# Altium PCB Logica.PcbDoc
Units mm, origin at the board's own origin, x right, y up, seen from the top; angles counter-clockwise.
Board outline 94.61 x 132.46 mm, 2 copper layers (Top Layer, Bottom Layer); 23 components, 55 nets, 143 pads, 4 vias.
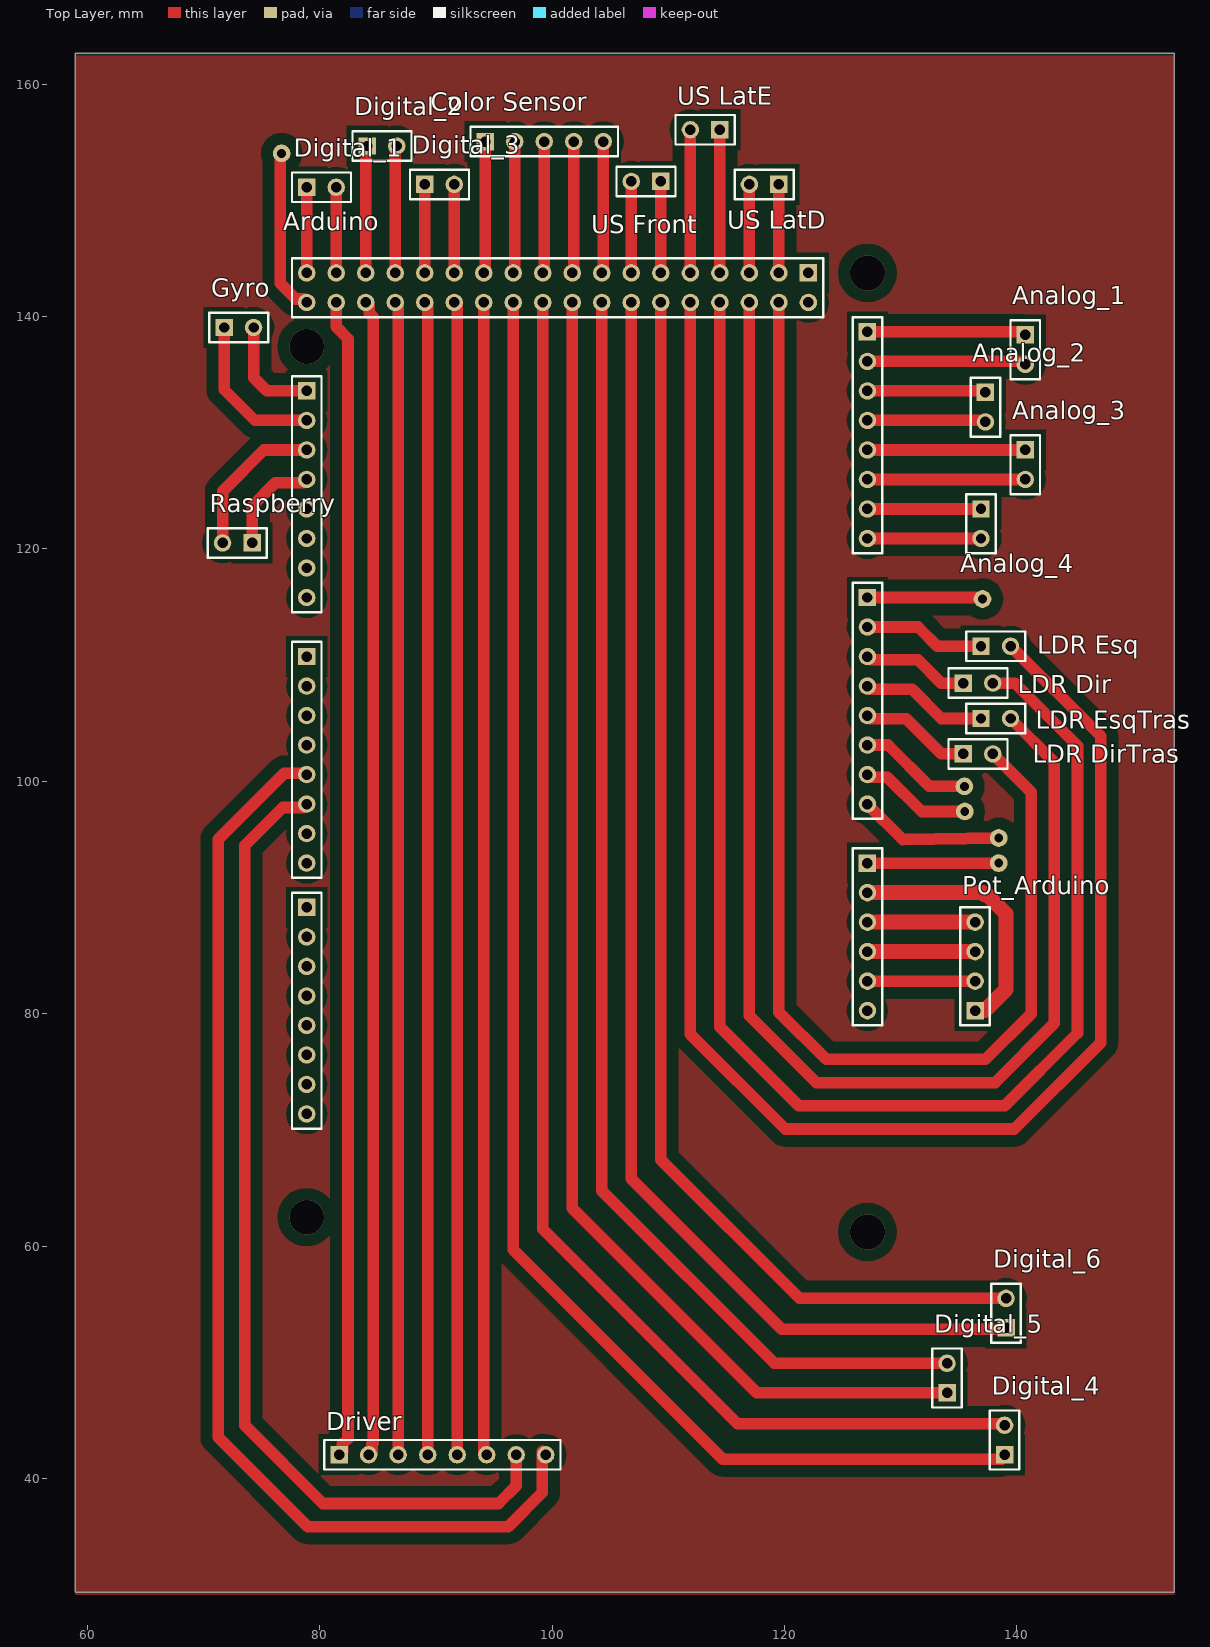
[diagram p0: Top Layer view]
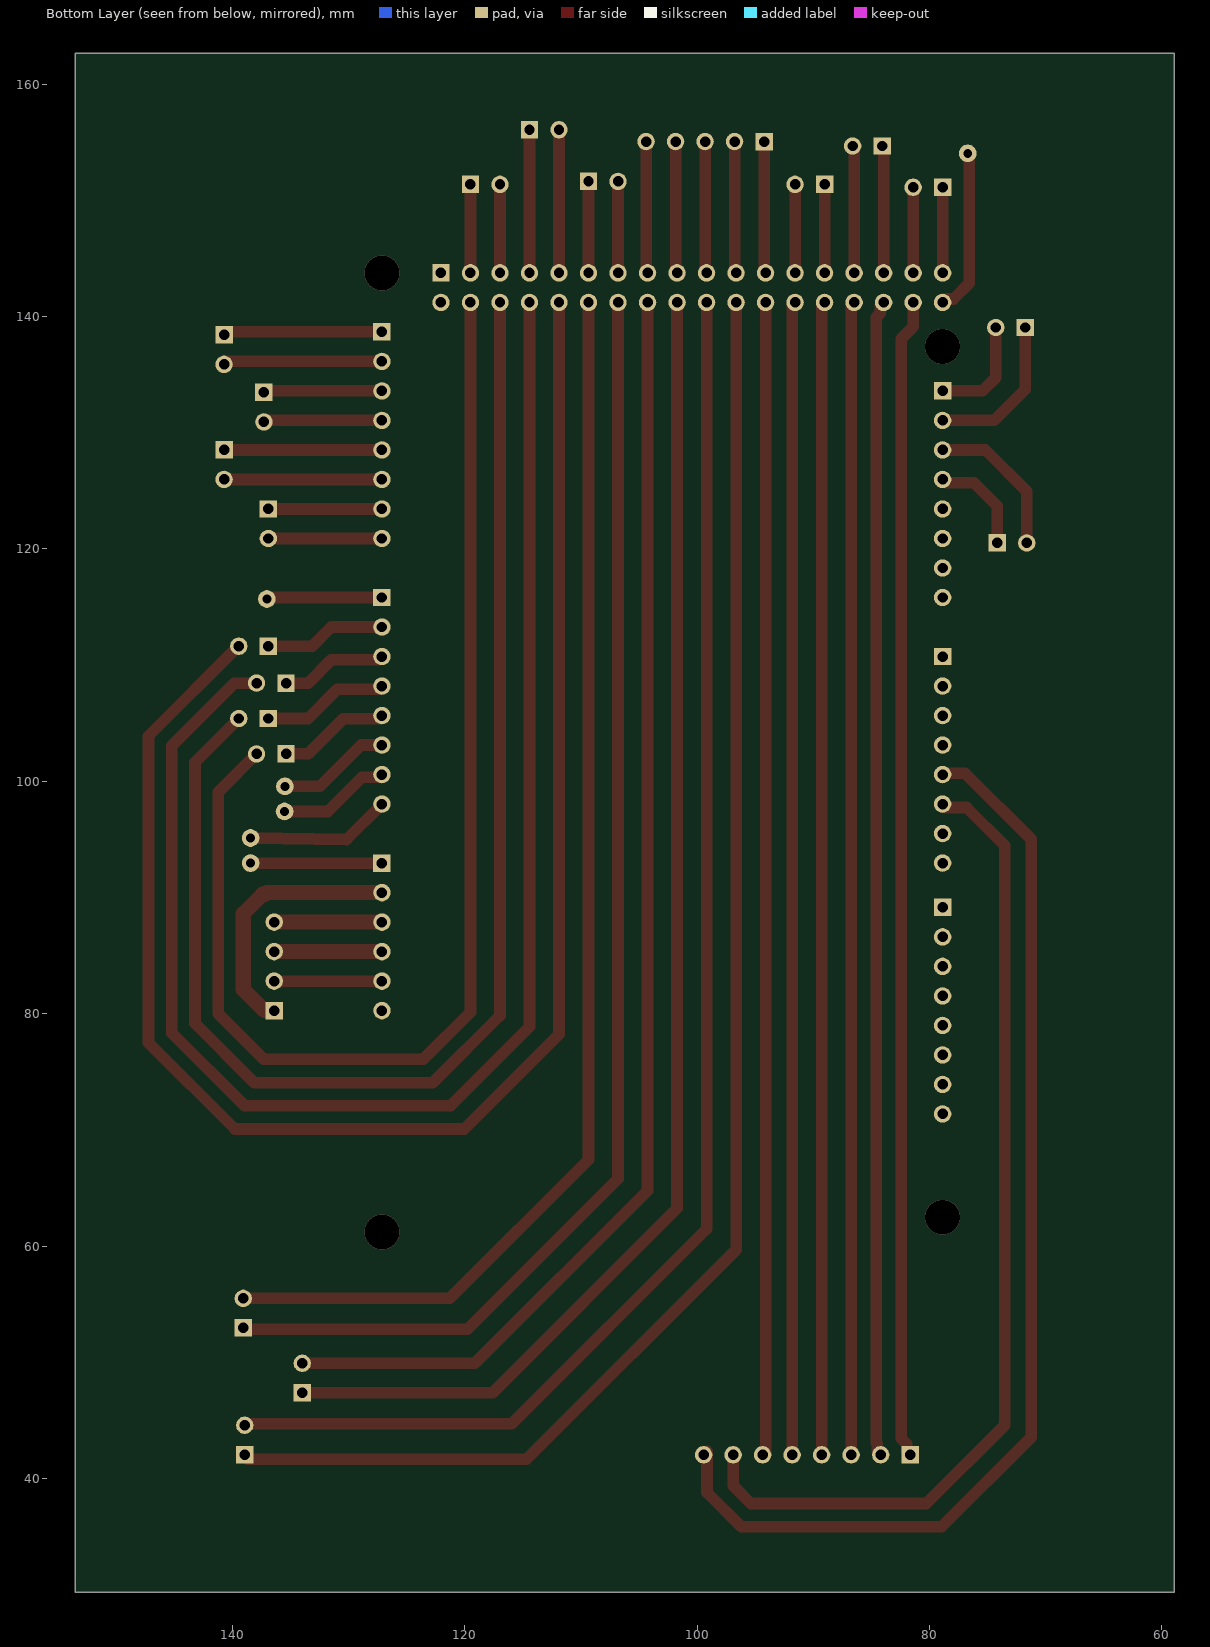
[diagram p1: Bottom Layer view, seen from below]

## Layer stack, top to bottom
Top Solder: solder mask 0.0102, Solder Resist, Dk 3.5
Top Layer: signal copper 0.0356
Dielectric 1: dielectric 0.32, FR-4, Dk 4.8
Bottom Layer: signal copper 0.0356
Bottom Solder: solder mask 0.0102, Solder Resist, Dk 3.5

## Board outline
58.928,30.226 153.543,30.226 153.543,162.687 58.928,162.687

## Design rules (kind name [scope] priority, off if disabled: settings)
Clearance [All] p1: gap=1
PolygonConnect [All] p1: connectstyle=Relief reliefconductorwidth=0.254 reliefentries=4 polygonreliefangle="90 Angle" airgapwidth=0.254
RoutingVias [All] p1: holewidth=0.711 width=1.27 viastyle="Through Hole" minholewidth=0.711 minwidth=1.27 maxholewidth=0.711 maxwidth=1.27
SolderMaskExpansion [All] p1: expansion=0.102
UnpouredPolygon [All] p1: allowunpoured=FALSE
Width [All] p1: maxlimit=1.3 minlimit=1 preferedwidth=1
29 further rules are at their usual default settings.

## Components (designator, comment, footprint, x,y, rotation, side; value= is the part's Value field where it differs from the comment)
Analog_1 "Header 2" HDR1X2 140.716,138.43 r270 top
Analog_2 "Header 2" HDR1X2 137.287,133.477 r270 top
Analog_3 "Header 2" HDR1X2 140.716,128.524 r270 top
Analog_4 "Header 2" HDR1X2 136.906,123.444 r270 top
Arduino "Arduino" Arduino 101.727,100.584 r90 top
"Color Sensor" "Header 5" HDR1X5 94.234,155.067 r0 top
Digital_1 "Header 2" HDR1X2 78.867,151.13 r0 top
Digital_2 "Header 2" HDR1X2 84.074,154.686 r0 top
Digital_3 "Header 2" HDR1X2 89.027,151.384 r0 top
Digital_4 "Header 2" HDR1X2 138.938,42.037 r90 top
Digital_5 "Header 2" HDR1X2 133.985,47.371 r90 top
Digital_6 "Header 2" HDR1X2 139.065,52.959 r90 top
Driver "Header 8" HDR1X8 81.661,42.037 r0 top
Gyro "Header 2" HDR1X2 71.755,139.065 r0 top
"LDR Dir" "Header 2" HDR1X2 135.382,108.458 r0 top
"LDR DirTras" "Header 2" HDR1X2 135.382,102.362 r0 top
"LDR Esq" "Header 2" HDR1X2 136.906,111.633 r0 top
"LDR EsqTras" "Header 2" HDR1X2 136.906,105.41 r0 top
Pot_Arduino "Header 4" HDR1X4 136.398,80.264 r90 top
Raspberry "Header 2" HDR1X2 74.168,120.523 r180 top
"US Front" "Header 2" HDR1X2 109.347,151.638 r180 top
"US LatD" "Header 2" HDR1X2 119.507,151.384 r180 top
"US LatE" "Header 2" HDR1X2 114.427,156.083 r180 top

## Footprints (in the part's own frame and the unit in brackets; to place one, negate y for a bottom-side part, rotate by r counter-clockwise, add the part's x,y. Pads: shape width x height; smd on the part's side, far side on the other; paste and mask are expansions set on the pad)
Arduino [mm] "Arduino Mega 2560"
  rect 1.5x1.5 hole 0.9: 0(10.16,22.86) 8(-11.43,22.86) 21(33.02,22.86) 59(-7.62,-25.4) 67(15.24,-25.4) 75(38.1,-25.4) 79(43.18,-20.32)
  round 1.5 hole 0.9: 1(7.62,22.86) 2(5.08,22.86) 3(2.54,22.86) 4(0,22.86) 5(-2.54,22.86) 6(-5.08,22.86) 7(-7.62,22.86) 9(-13.97,22.86) 10(-16.51,22.86) 11(-19.05,22.86) 12(-21.59,22.86) 13(-24.13,22.86) 14(15.24,22.86) 15(17.78,22.86) 16(20.32,22.86) 17(22.86,22.86) 18(25.4,22.86) 19(27.94,22.86) 20(30.48,22.86) 22(40.64,20.32) 23(43.18,20.32) 24(40.64,17.78) 25(43.18,17.78) 26(40.64,15.24) 27(43.18,15.24) 28(40.64,12.7) 29(43.18,12.7) 30(40.64,10.16) 31(43.18,10.16) 32(40.64,7.62) 33(43.18,7.62) 34(40.64,5.08) 35(43.18,5.08) 36(40.64,2.54) 37(43.18,2.54) 38(40.64,0) 39(43.18,0) 40(40.64,-2.54) 41(43.18,-2.54) 42(40.64,-5.08) 43(43.18,-5.08) 44(40.64,-7.62) 45(43.18,-7.62) 46(40.64,-10.16) 47(43.18,-10.16) 48(40.64,-12.7) 49(43.18,-12.7) 50(40.64,-15.24) 51(43.18,-15.24) 52(40.64,-17.78) 53(43.18,-17.78) 54(-20.32,-25.4) 55(-17.78,-25.4) 56(-15.24,-25.4) 57(-12.7,-25.4) 58(-10.16,-25.4) 60(-2.54,-25.4) 61(0,-25.4) 62(2.54,-25.4) 63(5.08,-25.4) 64(7.62,-25.4) 65(10.16,-25.4) 66(12.7,-25.4) 68(20.32,-25.4) 69(22.86,-25.4) 70(25.4,-25.4) 71(27.94,-25.4) 72(30.48,-25.4) 73(33.02,-25.4) 74(35.56,-25.4) 76(-26.67,22.86) 77(-29.21,22.86) 78(40.64,-20.32) 80(43.18,22.86) 81(40.64,22.86)
  silkscreen extent -30.48,-26.67 44.45,24.13
HDR1X2 [mm] "Connector; Header; 2 Position"
  rect 1.5x1.5 hole 0.9: 1(0,0)
  round 1.5 hole 0.9: 2(2.54,0)
  silkscreen extent -1.27,-1.27 3.81,1.27
HDR1X4 [mm] "Connector; Header; 4 Position"
  rect 1.5x1.5 hole 0.9: 1(0,0)
  round 1.5 hole 0.9: 2(2.54,0) 3(5.08,0) 4(7.62,0)
  silkscreen extent -1.27,-1.27 8.89,1.27
HDR1X5 [mm] "Connector; Header; 5 Position"
  rect 1.5x1.5 hole 0.9: 1(0,0)
  round 1.5 hole 0.9: 2(2.54,0) 3(5.08,0) 4(7.62,0) 5(10.16,0)
  silkscreen extent -1.27,-1.27 11.43,1.27
HDR1X8 [mm] "Connector; Header; 8 Position"
  rect 1.5x1.5 hole 0.9: 1(0,0)
  round 1.5 hole 0.9: 2(2.54,0) 3(5.08,0) 4(7.62,0) 5(10.16,0) 6(12.7,0) 7(15.24,0) 8(17.78,0)
  silkscreen extent -1.27,-1.27 19.05,1.27

## Part data
Analog_1 Analog_2 Analog_3 Analog_4 Digital_1 Digital_2 Digital_3 Digital_4 Digital_5 Digital_6 Gyro "LDR Dir" "LDR DirTras" "LDR Esq" "LDR EsqTras" Raspberry "US Front" "US LatD" "US LatE": "Header, 2-Pin"
"Color Sensor": "Header, 5-Pin"
Driver: "Header, 8-Pin"
Pot_Arduino: "Header, 4-Pin"

## Free pads (board coordinates)
  round 1.524 hole 0.762: 0(76.708,154.051) 1(137.033,115.697) 2(138.43,95.123) 3(138.43,92.964) 4(135.477,99.568) 5(135.509,97.409)

## Via types
v1: diameter 3, hole 3, Top Layer to Bottom Layer, 4 vias

## Nets (pads, with @x,y where several pads share a name; then routed paths per layer and width w, separated by ;. In a path a pad name is that pad's centre, name@x,y a point inside that pad or via, vN(x,y) a via of type N, cw(c..) or ccw(c..) an arc to the next point about the centre after c; other vN are vias at no path point)
3.3V: Arduino.55 Pot_Arduino.2 | length 9.3
  Top Layer w1: Arduino.55 Pot_Arduino.2
ALIMENTACAO: Arduino.56 Pot_Arduino.3 | length 9.3
  Top Layer w1.3: Arduino.56 Pot_Arduino.3
ANALOG_1A: Analog_1.1 Arduino.75 | length 13.6
  Top Layer w1: Arduino.75 Analog_1.1@140.716,138.684
ANALOG_1B: Analog_1.2 Arduino.74 | length 13.5
  Top Layer w1: Arduino.74@127.254,136.144 Analog_1.2@140.716,136.144
ANALOG_2A: Analog_2.1 Arduino.73 | length 9.9
  Top Layer w1: Arduino.73 Analog_2.1@137.033,133.604
ANALOG_2B: Analog_2.2 Arduino.72 | length 9.7
  Top Layer w1: Arduino.72@127.254,131.064 Analog_2.2@136.906,131.064
ANALOG_3A: Analog_3.1 Arduino.71 | length 13.6
  Top Layer w1: Arduino.71 Analog_3.1
ANALOG_3B: Analog_3.2 Arduino.70 | length 13.6
  Top Layer w1: Arduino.70 Analog_3.2
ANALOG_4A: Analog_4.1 Arduino.69 | length 9.8
  Top Layer w1: Arduino.69 Analog_4.1
ANALOG_4B: Analog_4.2 Arduino.68 | length 9.7
  Top Layer w1: Arduino.68 Analog_4.2@136.779,120.904
ANALOGD: "LDR Dir.1" Arduino.65 | length 9.2
  Top Layer w1: Arduino.65 127.417,110.454 131.481,110.454 133.477,108.458 135.382,108.458
ANALOGDT: "LDR DirTras.1" Arduino.63 | length 9.6
  Top Layer w1: Arduino.63 127.417,105.374 130.465,105.374 133.477,102.362 135.382,102.362
ANALOGE: "LDR Esq.1" Arduino.66 | length 10.5
  Top Layer w1: Arduino.66 131.479,113.284 133.13,111.633 136.906,111.633
ANALOGET: "LDR EsqTras.1" Arduino.64 | length 10.9
  Top Layer w1: Arduino.64 127.417,107.914 130.973,107.914 133.477,105.41 136.906,105.41
D_1A: Arduino.80 Digital_1.1 | length 7.4
  Top Layer w1: Arduino.80 Digital_1.1
D_1B: Arduino.23 Digital_1.2 | length 7.2
  Top Layer w1: Arduino.23 Digital_1.2@81.407,151.003
D_2A: Arduino.25 Digital_2.1 | length 10.2
  Top Layer w1: Arduino.25 83.947,153.924
D_2B: Arduino.27 Digital_2.2 | length 10.2
  Top Layer w1: Arduino.27 86.487,153.924
D_3A: Arduino.29 Digital_3.1 | length 7.6
  Top Layer w1: Arduino.29 Digital_3.1
D_3B: Arduino.31 Digital_3.2 | length 7.5
  Top Layer w1: Arduino.31 Digital_3.2@91.567,151.257
D_4A: Arduino.34 Digital_4.1 | length 131
  Top Layer w1: Arduino.34 96.647,59.69 114.681,41.656 Digital_4.1@138.684,41.656
D_4B: Arduino.36 Digital_4.2 | length 126.2
  Top Layer w1: Arduino.36 99.187,61.468 115.951,44.704 Digital_4.2@138.684,44.704
D_5A: Arduino.38 Digital_5.1 | length 116.8
  Top Layer w1: Arduino.38 101.727,63.246 117.602,47.371 Digital_5.1
D_5B: Arduino.40 Digital_5.2 | length 112.3
  Top Layer w1: Arduino.40 104.267,64.77 119.126,49.911 Digital_5.2
D_6A: Arduino.42 Digital_6.1 | length 112.7
  Top Layer w1: Arduino.42 106.807,65.786 119.761,52.832 Digital_6.1@138.684,52.832
D_6B: Arduino.44 Digital_6.2 | length 108.2
  Top Layer w1: Arduino.44 109.347,67.437 121.285,55.499 Digital_6.2@138.811,55.499
ECHODIR: "US LatD.2" Arduino.51 | length 7.6
  Top Layer w1: Arduino.51 116.967,151.384
ECHOESQ: "US LatE.2" Arduino.47 | length 12.3
  Top Layer w1: Arduino.47 111.887,156.083
ECHOF: "US Front.2" Arduino.43 | length 7.9
  Top Layer w1: Arduino.43 106.807,151.638
GND: Arduino.57 Pot_Arduino.4 | length 9
  Top Layer w1.3: Arduino.57@127.417,87.884 Pot_Arduino.4
GNDLOGIC: Arduino.58 Pot_Arduino.1 | length 22.6
  Top Layer w1.3: Arduino.58 137.04,90.424 137.18,90.284 137.392,90.284 139.065,88.611 139.065,82.077 137.252,80.264 Pot_Arduino.1
LEDD: "LDR Dir.2" Arduino.48 | length 132.8
  Top Layer w1: Arduino.48 114.427,78.867 121.221,72.073 121.914,72.073 135.63,72.073 138.944,72.073 145.215,78.344 145.215,103.07 139.827,108.458 137.922,108.458
LEDDT: "LDR DirTras.2" Arduino.52 | length 109.8
  Top Layer w1: Arduino.52 119.507,80.137 123.571,76.073 137.287,76.073 141.215,80.001 141.215,99.069 137.922,102.362
LEDE: "LDR Esq.2" Arduino.46 | length 142.1
  Top Layer w1: Arduino.46 111.887,78.232 120.046,70.073 121.086,70.073 134.802,70.073 139.772,70.073 147.215,77.516 147.215,103.898 139.48,111.633 139.446,111.633
LEDET: "LDR EsqTras.2" Arduino.50 | length 119.9
  Top Layer w1: Arduino.50 116.967,79.849 122.743,74.073 136.459,74.073 138.115,74.073 143.215,79.173 143.215,101.641 139.446,105.41
M1EN: Arduino.22 Driver.1 | length 99.9
  Top Layer w1: Arduino.22 81.407,139.117 82.423,138.101 82.423,43.441 81.951,42.969 81.951,42.327 Driver.1
M1INA: Arduino.26 Driver.3 | length 99.3
  Top Layer w1: Arduino.26 86.741,140.97 Driver.3
M1INB: Arduino.28 Driver.4 | length 99.3
  Top Layer w1: Arduino.28 89.281,140.97 Driver.4
M1PWM: Arduino.5 Driver.7 | length 86.2
  Top Layer w1: Arduino.5 78.577,97.754 76.809,97.754 73.533,94.478 73.533,44.577 80.264,37.846 95.377,37.846 96.901,39.37 Driver.7
M2EN: Arduino.24 Driver.2 | length 99.6
  Top Layer w1: Arduino.24 84.237,140.934 84.237,140.292 84.582,139.947 84.582,43.06 84.491,42.969 84.491,42.327 Driver.2
M2INA: Arduino.30 Driver.5 | length 99.3
  Top Layer w1: Arduino.30 91.821,140.97 Driver.5
M2INB: Arduino.32 Driver.6 | length 98.9
  Top Layer w1: Driver.6@94.107,42.291 Arduino.32
M2PWM: Arduino.4 Driver.8 | length 97.8
  Top Layer w1: Arduino.4 78.74,100.711 76.938,100.711 71.247,95.02 71.247,43.561 78.962,35.846 96.205,35.846 99.151,38.792 99.151,42.327 Driver.8
OUT: "Color Sensor.5" Arduino.41 | length 11.4
  Top Layer w1: Arduino.41 104.394,143.891 104.394,155.067
RX: Arduino.19 Raspberry.2 | length 13.3
  Top Layer w1: Raspberry.2 71.628,124.968 75.184,128.524 Arduino.19 Arduino.19@78.74,128.397
S0: "Color Sensor.1" Arduino.33 | length 11.2
  Top Layer w1: Arduino.33@94.234,143.891 94.234,155.067
S1: "Color Sensor.2" Arduino.35 | length 11.2
  Top Layer w1: Arduino.35@96.774,143.891 96.774,155.067
S2: "Color Sensor.3" Arduino.37 | length 11.2
  Top Layer w1: Arduino.37@99.314,143.891 99.314,155.067
S3: "Color Sensor.4" Arduino.39 | length 11.2
  Top Layer w1: Arduino.39@101.854,143.891 101.854,155.067
SCL: Arduino.21 Gyro.2 | length 9.7
  Top Layer w1: Gyro.2 74.295,134.747 75.438,133.604 Arduino.21 Arduino.21@78.613,133.35
SDA: Arduino.20 Gyro.1 | length 13.6
  Top Layer w1: Gyro.1 71.755,133.731 74.422,131.064 Arduino.20
TRIGGERDIR: "US LatD.1" Arduino.53 | length 7.6
  Top Layer w1: Arduino.53 119.507,151.384
TRIGGERESQ: "US LatE.1" Arduino.49 | length 12.3
  Top Layer w1: Arduino.49 114.427,156.083
TRIGGERF: "US Front.1" Arduino.45 | length 7.9
  Top Layer w1: Arduino.45 109.347,151.638
TX: Arduino.18 Raspberry.1 | length 8.8
  Top Layer w1: Raspberry.1 74.168,123.698 76.164,125.694 78.577,125.694 Arduino.18
pads on no net: Arduino.0 Arduino.1 Arduino.2 Arduino.3 Arduino.6 Arduino.7 Arduino.8 Arduino.9 Arduino.10 Arduino.11 Arduino.12 Arduino.13 Arduino.14 Arduino.15 Arduino.16 Arduino.17 Arduino.54 Arduino.59 Arduino.60 Arduino.61 Arduino.62 Arduino.67 Arduino.76 Arduino.77 Arduino.78 Arduino.79 Arduino.81
copper on no net: | length 67.3
  Top Layer w1: 76.581,153.924 76.581,142.868 77.935,141.514 78.577,141.514 78.867,141.224 ; 127.127,92.964 138.557,92.964 ; 127.127,98.044 130.175,94.996 138.43,95.123 ; 127.127,100.584 127.127,100.362 128.839,100.362 131.792,97.409 135.509,97.409 ; 127.127,103.124 128.905,103.124 132.461,99.568 135.477,99.568 ; 127.127,115.824 136.779,115.824
  other v1: 127.127,61.214 78.867,62.484 78.867,137.414 127.127,143.764

## Polygon pours and split planes (outlines as drawn)
no net on Top Layer "GND plane" (solid, pour order 6): 58.928,29.972 153.543,29.972 153.543,162.433 58.928,162.433